# EAGLE board vRef+Therm_Mod_pnl (EAGLE 8.0.1)
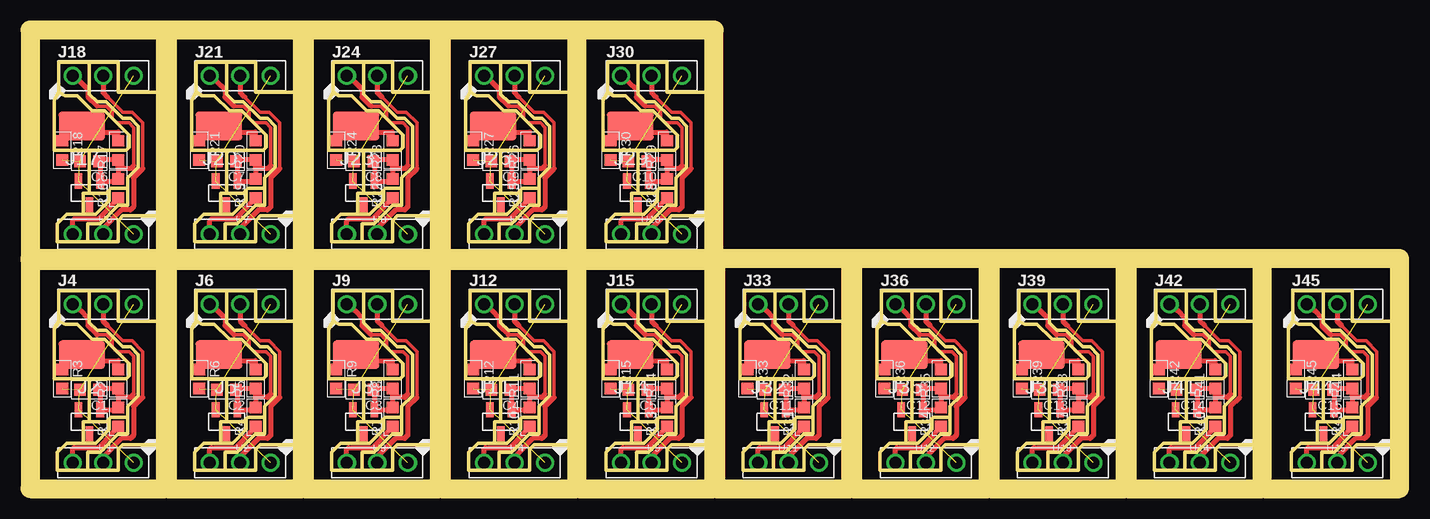
[diagram p0: board, top side]

Size 114.17 x 38.23 mm. Coordinates in mm from the lower left corner, seen from the top.
Outline: 45.72,0 57.02,0 57.02,19.18 45.72,19.18
Outline: 45.72,19.05 57.02,19.05 57.02,38.23 45.72,38.23
Outline: 102.87,0 114.17,0 114.17,19.18 102.87,19.18
Outline: 0,0 11.3,0 11.3,19.18 0,19.18 0,0
Outline: 11.43,0 22.73,0 22.73,19.18 11.43,19.18 11.43,0
Outline: 22.86,0 34.16,0 34.16,19.18 22.86,19.18 22.86,0
Outline: 34.29,0 45.59,0 45.59,19.18 34.29,19.18 34.29,0
Outline: 0,19.05 11.3,19.05 11.3,38.23 0,38.23 0,19.05
Outline: 11.43,19.05 22.73,19.05 22.73,38.23 11.43,38.23 11.43,19.05
Outline: 22.86,19.05 34.16,19.05 34.16,38.23 22.86,38.23 22.86,19.05
Outline: 34.29,19.05 45.59,19.05 45.59,38.23 34.29,38.23 34.29,19.05
Outline: 57.15,0 68.45,0 68.45,19.18 57.15,19.18 57.15,0
Outline: 68.58,0 79.88,0 79.88,19.18 68.58,19.18 68.58,0
Outline: 80.01,0 91.31,0 91.31,19.18 80.01,19.18 80.01,0
Outline: 91.44,0 102.74,0 102.74,19.18 91.44,19.18 91.44,0
Copper layers (1*16): Top 0.035mm / dielectric 1.5mm / Bottom 0.035mm
Design rules "default": minimum track width 10mil, minimum drill 0.6mm, track to track 8mil, track to pad 8mil, pad to pad 8mil, via to via 8mil, smd to smd 8mil, copper to edge 40mil, drill to drill 8mil, minimum pad ring 10mil, minimum via ring 8mil, stop-mask expansion 4mil, vias tented up to drill 0mil, thermal gap 10mil
Milling: 720 lines

## Footprints (pad centres in the part's own frame; a part is rotated, then mirrored left to right if it is on the bottom)
C0603-N = smd 0.95 x 1: 1 -0.8,0; 2 0.8,0
PTH_2.54MM_01X03 = drill 1: P$1 -2.54,0; P$2 0,0; P$3 2.54,0
1X01_LUXEON-PAD = smd 3.9 x 2.4: P$1 0,0
R0603-N = smd 0.95 x 1: 1 -0.8,0; 2 0.8,0
SOT23-3 = smd 0.635 x 1.27: 1 -0.9,-1; 2 0.9,-1; 3 0,1

## Placement (x,y rotation side)
C1  0.1uF  [C0603-N]  4.95,8.25 180 top
C2  0.1uF  [C0603-N]  16.38,8.25 180 top
C3  0.1uF  [C0603-N]  27.81,8.25 180 top
C4  0.1uF  [C0603-N]  39.24,8.25 180 top
C5  0.1uF  [C0603-N]  50.67,8.25 180 top
C6  0.1uF  [C0603-N]  4.95,27.3 180 top
C7  0.1uF  [C0603-N]  16.38,27.3 180 top
C8  0.1uF  [C0603-N]  27.81,27.3 180 top
C9  0.1uF  [C0603-N]  39.24,27.3 180 top
C10  0.1uF  [C0603-N]  50.67,27.3 180 top
C11  0.1uF  [C0603-N]  62.1,8.25 180 top
C12  0.1uF  [C0603-N]  73.53,8.25 180 top
C13  0.1uF  [C0603-N]  84.96,8.25 180 top
C14  0.1uF  [C0603-N]  96.39,8.25 180 top
C15  0.1uF  [C0603-N]  107.82,8.25 180 top
J1  MF-CON-2.54mm-01x03  [PTH_2.54MM_01X03]  6.1,2.16 180 top
J2  CON_01X01LUX  [1X01_LUXEON-PAD]  4.32,11.18 180 top
J3  MF-CON-2.54mm-01x03  [PTH_2.54MM_01X03]  17.53,2.16 180 top
J4  MF-CON-2.54mm-01x03  [PTH_2.54MM_01X03]  6.1,15.37 0 top
J5  CON_01X01LUX  [1X01_LUXEON-PAD]  15.75,11.18 180 top
J6  MF-CON-2.54mm-01x03  [PTH_2.54MM_01X03]  17.53,15.37 0 top
J7  MF-CON-2.54mm-01x03  [PTH_2.54MM_01X03]  28.96,2.16 180 top
J8  CON_01X01LUX  [1X01_LUXEON-PAD]  27.18,11.18 180 top
J9  MF-CON-2.54mm-01x03  [PTH_2.54MM_01X03]  28.96,15.37 0 top
J10  MF-CON-2.54mm-01x03  [PTH_2.54MM_01X03]  40.39,2.16 180 top
J11  CON_01X01LUX  [1X01_LUXEON-PAD]  38.61,11.18 180 top
J12  MF-CON-2.54mm-01x03  [PTH_2.54MM_01X03]  40.39,15.37 0 top
J13  MF-CON-2.54mm-01x03  [PTH_2.54MM_01X03]  51.82,2.16 180 top
J14  CON_01X01LUX  [1X01_LUXEON-PAD]  50.04,11.18 180 top
J15  MF-CON-2.54mm-01x03  [PTH_2.54MM_01X03]  51.82,15.37 0 top
J16  MF-CON-2.54mm-01x03  [PTH_2.54MM_01X03]  6.1,21.21 180 top
J17  CON_01X01LUX  [1X01_LUXEON-PAD]  4.32,30.23 180 top
J18  MF-CON-2.54mm-01x03  [PTH_2.54MM_01X03]  6.1,34.42 0 top
J19  MF-CON-2.54mm-01x03  [PTH_2.54MM_01X03]  17.53,21.21 180 top
J20  CON_01X01LUX  [1X01_LUXEON-PAD]  15.75,30.23 180 top
J21  MF-CON-2.54mm-01x03  [PTH_2.54MM_01X03]  17.53,34.42 0 top
J22  MF-CON-2.54mm-01x03  [PTH_2.54MM_01X03]  28.96,21.21 180 top
J23  CON_01X01LUX  [1X01_LUXEON-PAD]  27.18,30.23 180 top
J24  MF-CON-2.54mm-01x03  [PTH_2.54MM_01X03]  28.96,34.42 0 top
J25  MF-CON-2.54mm-01x03  [PTH_2.54MM_01X03]  40.39,21.21 180 top
J26  CON_01X01LUX  [1X01_LUXEON-PAD]  38.61,30.23 180 top
J27  MF-CON-2.54mm-01x03  [PTH_2.54MM_01X03]  40.39,34.42 0 top
J28  MF-CON-2.54mm-01x03  [PTH_2.54MM_01X03]  51.82,21.21 180 top
J29  CON_01X01LUX  [1X01_LUXEON-PAD]  50.04,30.23 180 top
J30  MF-CON-2.54mm-01x03  [PTH_2.54MM_01X03]  51.82,34.42 0 top
J31  MF-CON-2.54mm-01x03  [PTH_2.54MM_01X03]  63.25,2.16 180 top
J32  CON_01X01LUX  [1X01_LUXEON-PAD]  61.47,11.18 180 top
J33  MF-CON-2.54mm-01x03  [PTH_2.54MM_01X03]  63.25,15.37 0 top
J34  MF-CON-2.54mm-01x03  [PTH_2.54MM_01X03]  74.68,2.16 180 top
J35  CON_01X01LUX  [1X01_LUXEON-PAD]  72.9,11.18 180 top
J36  MF-CON-2.54mm-01x03  [PTH_2.54MM_01X03]  74.68,15.37 0 top
J37  MF-CON-2.54mm-01x03  [PTH_2.54MM_01X03]  86.11,2.16 180 top
J38  CON_01X01LUX  [1X01_LUXEON-PAD]  84.33,11.18 180 top
J39  MF-CON-2.54mm-01x03  [PTH_2.54MM_01X03]  86.11,15.37 0 top
J40  MF-CON-2.54mm-01x03  [PTH_2.54MM_01X03]  97.54,2.16 180 top
J41  CON_01X01LUX  [1X01_LUXEON-PAD]  95.76,11.18 180 top
J42  MF-CON-2.54mm-01x03  [PTH_2.54MM_01X03]  97.54,15.37 0 top
J43  MF-CON-2.54mm-01x03  [PTH_2.54MM_01X03]  108.97,2.16 180 top
J44  CON_01X01LUX  [1X01_LUXEON-PAD]  107.19,11.18 180 top
J45  MF-CON-2.54mm-01x03  [PTH_2.54MM_01X03]  108.97,15.37 0 top
R1  100  [R0603-N]  7.37,5.97 90 top
R2  10k 0.1%  [R0603-N]  7.37,9.14 90 top
R3  10K NTC Thermistor  [R0603-N]  2.67,9.14 270 top
R4  100  [R0603-N]  18.8,5.97 90 top
R5  10k 0.1%  [R0603-N]  18.8,9.14 90 top
R6  10K NTC Thermistor  [R0603-N]  14.1,9.14 270 top
R7  100  [R0603-N]  30.23,5.97 90 top
R8  10k 0.1%  [R0603-N]  30.23,9.14 90 top
R9  10K NTC Thermistor  [R0603-N]  25.53,9.14 270 top
R10  100  [R0603-N]  41.66,5.97 90 top
R11  10k 0.1%  [R0603-N]  41.66,9.14 90 top
R12  10K NTC Thermistor  [R0603-N]  36.96,9.14 270 top
R13  100  [R0603-N]  53.09,5.97 90 top
R14  10k 0.1%  [R0603-N]  53.09,9.14 90 top
R15  10K NTC Thermistor  [R0603-N]  48.39,9.14 270 top
R16  100  [R0603-N]  7.37,25.02 90 top
R17  10k 0.1%  [R0603-N]  7.37,28.19 90 top
R18  10K NTC Thermistor  [R0603-N]  2.67,28.19 270 top
R19  100  [R0603-N]  18.8,25.02 90 top
R20  10k 0.1%  [R0603-N]  18.8,28.19 90 top
R21  10K NTC Thermistor  [R0603-N]  14.1,28.19 270 top
R22  100  [R0603-N]  30.23,25.02 90 top
R23  10k 0.1%  [R0603-N]  30.23,28.19 90 top
R24  10K NTC Thermistor  [R0603-N]  25.53,28.19 270 top
R25  100  [R0603-N]  41.66,25.02 90 top
R26  10k 0.1%  [R0603-N]  41.66,28.19 90 top
R27  10K NTC Thermistor  [R0603-N]  36.96,28.19 270 top
R28  100  [R0603-N]  53.09,25.02 90 top
R29  10k 0.1%  [R0603-N]  53.09,28.19 90 top
R30  10K NTC Thermistor  [R0603-N]  48.39,28.19 270 top
R31  100  [R0603-N]  64.52,5.97 90 top
R32  10k 0.1%  [R0603-N]  64.52,9.14 90 top
R33  10K NTC Thermistor  [R0603-N]  59.82,9.14 270 top
R34  100  [R0603-N]  75.95,5.97 90 top
R35  10k 0.1%  [R0603-N]  75.95,9.14 90 top
R36  10K NTC Thermistor  [R0603-N]  71.25,9.14 270 top
R37  100  [R0603-N]  87.38,5.97 90 top
R38  10k 0.1%  [R0603-N]  87.38,9.14 90 top
R39  10K NTC Thermistor  [R0603-N]  82.68,9.14 270 top
R40  100  [R0603-N]  98.81,5.97 90 top
R41  10k 0.1%  [R0603-N]  98.81,9.14 90 top
R42  10K NTC Thermistor  [R0603-N]  94.11,9.14 270 top
R43  100  [R0603-N]  110.24,5.97 90 top
R44  10k 0.1%  [R0603-N]  110.24,9.14 90 top
R45  10K NTC Thermistor  [R0603-N]  105.54,9.14 270 top
U1  LM4040-SOT-23-3  [SOT23-3]  4.95,5.59 180 top
U2  LM4040-SOT-23-3  [SOT23-3]  16.38,5.59 180 top
U3  LM4040-SOT-23-3  [SOT23-3]  27.81,5.59 180 top
U4  LM4040-SOT-23-3  [SOT23-3]  39.24,5.59 180 top
U5  LM4040-SOT-23-3  [SOT23-3]  50.67,5.59 180 top
U6  LM4040-SOT-23-3  [SOT23-3]  4.95,24.64 180 top
U7  LM4040-SOT-23-3  [SOT23-3]  16.38,24.64 180 top
U8  LM4040-SOT-23-3  [SOT23-3]  27.81,24.64 180 top
U9  LM4040-SOT-23-3  [SOT23-3]  39.24,24.64 180 top
U10  LM4040-SOT-23-3  [SOT23-3]  50.67,24.64 180 top
U11  LM4040-SOT-23-3  [SOT23-3]  62.1,5.59 180 top
U12  LM4040-SOT-23-3  [SOT23-3]  73.53,5.59 180 top
U13  LM4040-SOT-23-3  [SOT23-3]  84.96,5.59 180 top
U14  LM4040-SOT-23-3  [SOT23-3]  96.39,5.59 180 top
U15  LM4040-SOT-23-3  [SOT23-3]  107.82,5.59 180 top

## Library data of the parts
C1-C15 R1-R45 = My_Passives
J1 J3 J4 J6 J7 J9 J10 J12 J13 J15 J16 J18 J19 J21 J22 J24 J25 J27 J28 J30 J31 J33 J34 J36 J37 J39 J40 J42 J43 J45 = My_Connectors; HOUSEPART: YES; MPN: MF-CON-2.54mm-01x03; POPULATE: 1; URL: https://factory.macrofab.com/part/MF-CON-2.54mm-01x03
J2 J5 J8 J11 J14 J17 J20 J23 J26 J29 J32 J35 J38 J41 J44 = My_Connectors
U1-U15 = My_Descrete_Semiconductors; PARTNO: LM4040AIM3-2.0/NOPB

## Nets
2V0: C1.1 J4.P$1 R1.2 R2.1 U1.1
2V1: C2.1 J6.P$1 R4.2 R5.1 U2.1
2V2: C3.1 J9.P$1 R7.2 R8.1 U3.1
2V3: C4.1 J12.P$1 R10.2 R11.1 U4.1
2V4: C5.1 J15.P$1 R13.2 R14.1 U5.1
2V5: C6.1 J18.P$1 R16.2 R17.1 U6.1
2V6: C7.1 J21.P$1 R19.2 R20.1 U7.1
2V7: C8.1 J24.P$1 R22.2 R23.1 U8.1
2V8: C9.1 J27.P$1 R25.2 R26.1 U9.1
2V9: C10.1 J30.P$1 R28.2 R29.1 U10.1
2V10: C11.1 J33.P$1 R31.2 R32.1 U11.1
2V11: C12.1 J36.P$1 R34.2 R35.1 U12.1
2V12: C13.1 J39.P$1 R37.2 R38.1 U13.1
2V13: C14.1 J42.P$1 R40.2 R41.1 U14.1
2V14: C15.1 J45.P$1 R43.2 R44.1 U15.1
3V1: J3.P$3 R4.1
3V2: J7.P$3 R7.1
3V3: J1.P$3 R1.1
3V4: J10.P$3 R10.1
3V5: J13.P$3 R13.1
3V6: J16.P$3 R16.1
3V7: J19.P$3 R19.1
3V8: J22.P$3 R22.1
3V9: J25.P$3 R25.1
3V10: J28.P$3 R28.1
3V11: J31.P$3 R31.1
3V12: J34.P$3 R34.1
3V13: J37.P$3 R37.1
3V14: J40.P$3 R40.1
3V15: J43.P$3 R43.1
GND: C1.2 J1.P$1 J4.P$3 R3.2 U1.2
GND1: C2.2 J3.P$1 J6.P$3 R6.2 U2.2
GND2: C3.2 J7.P$1 J9.P$3 R9.2 U3.2
GND3: C4.2 J10.P$1 J12.P$3 R12.2 U4.2
GND4: C5.2 J13.P$1 J15.P$3 R15.2 U5.2
GND5: C6.2 J16.P$1 J18.P$3 R18.2 U6.2
GND6: C7.2 J19.P$1 J21.P$3 R21.2 U7.2
GND7: C8.2 J22.P$1 J24.P$3 R24.2 U8.2
GND8: C9.2 J25.P$1 J27.P$3 R27.2 U9.2
GND9: C10.2 J28.P$1 J30.P$3 R30.2 U10.2
GND10: C11.2 J31.P$1 J33.P$3 R33.2 U11.2
GND11: C12.2 J34.P$1 J36.P$3 R36.2 U12.2
GND12: C13.2 J37.P$1 J39.P$3 R39.2 U13.2
GND13: C14.2 J40.P$1 J42.P$3 R42.2 U14.2
GND14: C15.2 J43.P$1 J45.P$3 R45.2 U15.2
SENSE: J1.P$2 J4.P$2
SENSE1: J3.P$2 J6.P$2
SENSE2: J7.P$2 J9.P$2
SENSE3: J10.P$2 J12.P$2
SENSE4: J13.P$2 J15.P$2
SENSE5: J16.P$2 J18.P$2
SENSE6: J19.P$2 J21.P$2
SENSE7: J22.P$2 J24.P$2
SENSE8: J25.P$2 J27.P$2
SENSE9: J28.P$2 J30.P$2
SENSE10: J31.P$2 J33.P$2
SENSE11: J34.P$2 J36.P$2
SENSE12: J37.P$2 J39.P$2
SENSE13: J40.P$2 J42.P$2
SENSE14: J43.P$2 J45.P$2
THERM: J2.P$1 R2.2 R3.1
THERM1: J5.P$1 R5.2 R6.1
THERM2: J8.P$1 R8.2 R9.1
THERM3: J11.P$1 R11.2 R12.1
THERM4: J14.P$1 R14.2 R15.1
THERM5: J17.P$1 R17.2 R18.1
THERM6: J20.P$1 R20.2 R21.1
THERM7: J23.P$1 R23.2 R24.1
THERM8: J26.P$1 R26.2 R27.1
THERM9: J29.P$1 R29.2 R30.1
THERM10: J32.P$1 R32.2 R33.1
THERM11: J35.P$1 R35.2 R36.1
THERM12: J38.P$1 R38.2 R39.1
THERM13: J41.P$1 R41.2 R42.1
THERM14: J44.P$1 R44.2 R45.1

## Tracks (layer width: path | path; a pad name or v marks a point on that pad's centre or on a via)
2V0
  Top 0.305: 8.64,7.87 8.64,11.05 8.25,11.43 7.24,11.43 6.86,11.81 6.86,12.32 6.35,12.83 5.59,12.83
  Top 0.406: 5.85,8.15 U1.1 7.18,6.59 R1.2 7.37,7.62 | 5.85,8.15 C1.1 | 7.37,7.62 R2.1 6.04,8.34 5.85,8.15 | 8.64,7.87 8.38,7.62 7.37,7.62 | J4.P$1 4.19,14.86 4.83,14.22 4.83,13.59 5.59,12.83
2V1
  Top 0.305: 20.07,7.87 20.07,11.05 19.69,11.43 18.67,11.43 18.29,11.81 18.29,12.32 17.78,12.83 17.02,12.83
  Top 0.406: 17.28,8.15 U2.1 18.62,6.59 R4.2 18.8,7.62 | 17.28,8.15 C2.1 | 18.8,7.62 R5.1 17.47,8.34 17.28,8.15 | 20.07,7.87 19.81,7.62 18.8,7.62 | J6.P$1 15.62,14.86 16.26,14.22 16.26,13.59 17.02,12.83
2V2
  Top 0.305: 31.5,7.87 31.5,11.05 31.12,11.43 30.1,11.43 29.72,11.81 29.72,12.32 29.21,12.83 28.45,12.83
  Top 0.406: 28.71,8.15 U3.1 30.05,6.59 R7.2 30.23,7.62 | 28.71,8.15 C3.1 | 30.23,7.62 R8.1 28.9,8.34 28.71,8.15 | 31.5,7.87 31.24,7.62 30.23,7.62 | J9.P$1 27.05,14.86 27.69,14.22 27.69,13.59 28.45,12.83
2V3
  Top 0.305: 42.93,7.87 42.93,11.05 42.55,11.43 41.53,11.43 41.15,11.81 41.15,12.32 40.64,12.83 39.88,12.83
  Top 0.406: 40.14,8.15 U4.1 41.48,6.59 R10.2 41.66,7.62 | 40.14,8.15 C4.1 | 41.66,7.62 R11.1 40.33,8.34 40.14,8.15 | 42.93,7.87 42.67,7.62 41.66,7.62 | J12.P$1 38.48,14.86 39.12,14.22 39.12,13.59 39.88,12.83
2V4
  Top 0.305: 54.36,7.87 54.36,11.05 53.98,11.43 52.96,11.43 52.58,11.81 52.58,12.32 52.07,12.83 51.31,12.83
  Top 0.406: 51.57,8.15 U5.1 52.91,6.59 R13.2 53.09,7.62 | 51.57,8.15 C5.1 | 53.09,7.62 R14.1 51.76,8.34 51.57,8.15 | 54.36,7.87 54.1,7.62 53.09,7.62 | J15.P$1 49.91,14.86 50.55,14.22 50.55,13.59 51.31,12.83
2V5
  Top 0.305: 8.64,26.92 8.64,30.1 8.25,30.48 7.24,30.48 6.86,30.86 6.86,31.37 6.35,31.88 5.59,31.88
  Top 0.406: 5.85,27.2 U6.1 7.18,25.64 R16.2 7.37,26.67 | 5.85,27.2 C6.1 | 7.37,26.67 R17.1 6.04,27.39 5.85,27.2 | 8.64,26.92 8.38,26.67 7.37,26.67 | J18.P$1 4.19,33.91 4.83,33.27 4.83,32.64 5.59,31.88
2V6
  Top 0.305: 20.07,26.92 20.07,30.1 19.69,30.48 18.67,30.48 18.29,30.86 18.29,31.37 17.78,31.88 17.02,31.88
  Top 0.406: 17.28,27.2 U7.1 18.62,25.64 R19.2 18.8,26.67 | 17.28,27.2 C7.1 | 18.8,26.67 R20.1 17.47,27.39 17.28,27.2 | 20.07,26.92 19.81,26.67 18.8,26.67 | J21.P$1 15.62,33.91 16.26,33.27 16.26,32.64 17.02,31.88
2V7
  Top 0.305: 31.5,26.92 31.5,30.1 31.12,30.48 30.1,30.48 29.72,30.86 29.72,31.37 29.21,31.88 28.45,31.88
  Top 0.406: 28.71,27.2 U8.1 30.05,25.64 R22.2 30.23,26.67 | 28.71,27.2 C8.1 | 30.23,26.67 R23.1 28.9,27.39 28.71,27.2 | 31.5,26.92 31.24,26.67 30.23,26.67 | J24.P$1 27.05,33.91 27.69,33.27 27.69,32.64 28.45,31.88
2V8
  Top 0.305: 42.93,26.92 42.93,30.1 42.55,30.48 41.53,30.48 41.15,30.86 41.15,31.37 40.64,31.88 39.88,31.88
  Top 0.406: 40.14,27.2 U9.1 41.48,25.64 R25.2 41.66,26.67 | 40.14,27.2 C9.1 | 41.66,26.67 R26.1 40.33,27.39 40.14,27.2 | 42.93,26.92 42.67,26.67 41.66,26.67 | J27.P$1 38.48,33.91 39.12,33.27 39.12,32.64 39.88,31.88
2V9
  Top 0.305: 54.36,26.92 54.36,30.1 53.98,30.48 52.96,30.48 52.58,30.86 52.58,31.37 52.07,31.88 51.31,31.88
  Top 0.406: 51.57,27.2 U10.1 52.91,25.64 R28.2 53.09,26.67 | 51.57,27.2 C10.1 | 53.09,26.67 R29.1 51.76,27.39 51.57,27.2 | 54.36,26.92 54.1,26.67 53.09,26.67 | J30.P$1 49.91,33.91 50.55,33.27 50.55,32.64 51.31,31.88
2V10
  Top 0.305: 65.79,7.87 65.79,11.05 65.41,11.43 64.39,11.43 64.01,11.81 64.01,12.32 63.5,12.83 62.74,12.83
  Top 0.406: 63,8.15 U11.1 64.34,6.59 R31.2 64.52,7.62 | 63,8.15 C11.1 | 64.52,7.62 R32.1 63.19,8.34 63,8.15 | 65.79,7.87 65.53,7.62 64.52,7.62 | J33.P$1 61.34,14.86 61.98,14.22 61.98,13.59 62.74,12.83
2V11
  Top 0.305: 77.22,7.87 77.22,11.05 76.84,11.43 75.82,11.43 75.44,11.81 75.44,12.32 74.93,12.83 74.17,12.83
  Top 0.406: 74.43,8.15 U12.1 75.77,6.59 R34.2 75.95,7.62 | 74.43,8.15 C12.1 | 75.95,7.62 R35.1 74.62,8.34 74.43,8.15 | 77.22,7.87 76.96,7.62 75.95,7.62 | J36.P$1 72.77,14.86 73.41,14.22 73.41,13.59 74.17,12.83
2V12
  Top 0.305: 88.65,7.87 88.65,11.05 88.27,11.43 87.25,11.43 86.87,11.81 86.87,12.32 86.36,12.83 85.6,12.83
  Top 0.406: 85.86,8.15 U13.1 87.2,6.59 R37.2 87.38,7.62 | 85.86,8.15 C13.1 | 87.38,7.62 R38.1 86.05,8.34 85.86,8.15 | 88.65,7.87 88.39,7.62 87.38,7.62 | J39.P$1 84.2,14.86 84.84,14.22 84.84,13.59 85.6,12.83
2V13
  Top 0.305: 100.08,7.87 100.08,11.05 99.7,11.43 98.68,11.43 98.3,11.81 98.3,12.32 97.79,12.83 97.03,12.83
  Top 0.406: 97.29,8.15 U14.1 98.62,6.59 R40.2 98.81,7.62 | 97.29,8.15 C14.1 | 98.81,7.62 R41.1 97.48,8.34 97.29,8.15 | 100.08,7.87 99.82,7.62 98.81,7.62 | J42.P$1 95.63,14.86 96.27,14.22 96.27,13.59 97.03,12.83
2V14
  Top 0.305: 111.51,7.87 111.51,11.05 111.12,11.43 110.11,11.43 109.73,11.81 109.73,12.32 109.22,12.83 108.46,12.83
  Top 0.406: 108.72,8.15 U15.1 110.06,6.59 R43.2 110.24,7.62 | 108.72,8.15 C15.1 | 110.24,7.62 R44.1 108.91,8.34 108.72,8.15 | 111.51,7.87 111.25,7.62 110.24,7.62 | J45.P$1 107.06,14.86 107.7,14.22 107.7,13.59 108.46,12.83
3V1
  Top 0.406: J3.P$3 14.99,3.3 15.11,3.43 17.15,3.43 17.53,3.81 R4.1
3V2
  Top 0.406: J7.P$3 26.42,3.3 26.54,3.43 28.58,3.43 28.96,3.81 R7.1
3V3
  Top 0.406: J1.P$3 3.56,3.3 3.68,3.43 5.71,3.43 6.1,3.81 R1.1
3V4
  Top 0.406: J10.P$3 37.85,3.3 37.97,3.43 40,3.43 40.39,3.81 R10.1
3V5
  Top 0.406: J13.P$3 49.28,3.3 49.4,3.43 51.43,3.43 51.82,3.81 R13.1
3V6
  Top 0.406: J16.P$3 3.56,22.35 3.68,22.48 5.71,22.48 6.1,22.86 R16.1
3V7
  Top 0.406: J19.P$3 14.99,22.35 15.11,22.48 17.15,22.48 17.53,22.86 R19.1
3V8
  Top 0.406: J22.P$3 26.42,22.35 26.54,22.48 28.58,22.48 28.96,22.86 R22.1
3V9
  Top 0.406: J25.P$3 37.85,22.35 37.97,22.48 40,22.48 40.39,22.86 R25.1
3V10
  Top 0.406: J28.P$3 49.28,22.35 49.4,22.48 51.43,22.48 51.82,22.86 R28.1
3V11
  Top 0.406: J31.P$3 60.71,3.3 60.83,3.43 62.86,3.43 63.25,3.81 R31.1
3V12
  Top 0.406: J34.P$3 72.14,3.3 72.26,3.43 74.3,3.43 74.68,3.81 R34.1
3V13
  Top 0.406: J37.P$3 83.57,3.3 83.69,3.43 85.73,3.43 86.11,3.81 R37.1
3V14
  Top 0.406: J40.P$3 95,3.3 95.12,3.43 97.16,3.43 97.54,3.81 R40.1
3V15
  Top 0.406: J43.P$3 106.43,3.3 106.55,3.43 108.59,3.43 108.97,3.81 R43.1
GND  (4 unrouted)
GND1  (4 unrouted)
GND2  (4 unrouted)
GND3  (4 unrouted)
GND4  (4 unrouted)
GND5  (4 unrouted)
GND6  (4 unrouted)
GND7  (4 unrouted)
GND8  (4 unrouted)
GND9  (4 unrouted)
GND10  (4 unrouted)
GND11  (4 unrouted)
GND12  (4 unrouted)
GND13  (4 unrouted)
GND14  (4 unrouted)
SENSE
  Top 0.305: 9.4,7.62 9.4,11.43 8.51,12.32 7.75,12.32 6.48,13.59
  Top 0.406: J1.P$2 6.1,2.67 7.62,4.19 8.38,4.19 8.64,4.45 8.64,6.86 9.4,7.62 | J4.P$2 6.1,13.97 6.48,13.59
SENSE1
  Top 0.305: 20.83,7.62 20.83,11.43 19.94,12.32 19.18,12.32 17.91,13.59
  Top 0.406: J3.P$2 17.53,2.67 19.05,4.19 19.81,4.19 20.07,4.45 20.07,6.86 20.83,7.62 | J6.P$2 17.53,13.97 17.91,13.59
SENSE2
  Top 0.305: 32.26,7.62 32.26,11.43 31.37,12.32 30.61,12.32 29.34,13.59
  Top 0.406: J7.P$2 28.96,2.67 30.48,4.19 31.24,4.19 31.5,4.45 31.5,6.86 32.26,7.62 | J9.P$2 28.96,13.97 29.34,13.59
SENSE3
  Top 0.305: 43.69,7.62 43.69,11.43 42.8,12.32 42.04,12.32 40.77,13.59
  Top 0.406: J10.P$2 40.39,2.67 41.91,4.19 42.67,4.19 42.93,4.45 42.93,6.86 43.69,7.62 | J12.P$2 40.39,13.97 40.77,13.59
SENSE4
  Top 0.305: 55.12,7.62 55.12,11.43 54.23,12.32 53.47,12.32 52.2,13.59
  Top 0.406: J13.P$2 51.82,2.67 53.34,4.19 54.1,4.19 54.36,4.45 54.36,6.86 55.12,7.62 | J15.P$2 51.82,13.97 52.2,13.59
SENSE5
  Top 0.305: 9.4,26.67 9.4,30.48 8.51,31.37 7.75,31.37 6.48,32.64
  Top 0.406: J16.P$2 6.1,21.72 7.62,23.24 8.38,23.24 8.64,23.5 8.64,25.91 9.4,26.67 | J18.P$2 6.1,33.02 6.48,32.64
SENSE6
  Top 0.305: 20.83,26.67 20.83,30.48 19.94,31.37 19.18,31.37 17.91,32.64
  Top 0.406: J19.P$2 17.53,21.72 19.05,23.24 19.81,23.24 20.07,23.5 20.07,25.91 20.83,26.67 | J21.P$2 17.53,33.02 17.91,32.64
SENSE7
  Top 0.305: 32.26,26.67 32.26,30.48 31.37,31.37 30.61,31.37 29.34,32.64
  Top 0.406: J22.P$2 28.96,21.72 30.48,23.24 31.24,23.24 31.5,23.5 31.5,25.91 32.26,26.67 | J24.P$2 28.96,33.02 29.34,32.64
SENSE8
  Top 0.305: 43.69,26.67 43.69,30.48 42.8,31.37 42.04,31.37 40.77,32.64
  Top 0.406: J25.P$2 40.39,21.72 41.91,23.24 42.67,23.24 42.93,23.5 42.93,25.91 43.69,26.67 | J27.P$2 40.39,33.02 40.77,32.64
SENSE9
  Top 0.305: 55.12,26.67 55.12,30.48 54.23,31.37 53.47,31.37 52.2,32.64
  Top 0.406: J28.P$2 51.82,21.72 53.34,23.24 54.1,23.24 54.36,23.5 54.36,25.91 55.12,26.67 | J30.P$2 51.82,33.02 52.2,32.64
SENSE10
  Top 0.305: 66.55,7.62 66.55,11.43 65.66,12.32 64.9,12.32 63.63,13.59
  Top 0.406: J31.P$2 63.25,2.67 64.77,4.19 65.53,4.19 65.79,4.45 65.79,6.86 66.55,7.62 | J33.P$2 63.25,13.97 63.63,13.59
SENSE11
  Top 0.305: 77.98,7.62 77.98,11.43 77.09,12.32 76.33,12.32 75.06,13.59
  Top 0.406: J34.P$2 74.68,2.67 76.2,4.19 76.96,4.19 77.22,4.45 77.22,6.86 77.98,7.62 | J36.P$2 74.68,13.97 75.06,13.59
SENSE12
  Top 0.305: 89.41,7.62 89.41,11.43 88.52,12.32 87.76,12.32 86.49,13.59
  Top 0.406: J37.P$2 86.11,2.67 87.63,4.19 88.39,4.19 88.65,4.45 88.65,6.86 89.41,7.62 | J39.P$2 86.11,13.97 86.49,13.59
SENSE13
  Top 0.305: 100.84,7.62 100.84,11.43 99.95,12.32 99.19,12.32 97.92,13.59
  Top 0.406: J40.P$2 97.54,2.67 99.06,4.19 99.82,4.19 100.08,4.45 100.08,6.86 100.84,7.62 | J42.P$2 97.54,13.97 97.92,13.59
SENSE14
  Top 0.305: 112.27,7.62 112.27,11.43 111.38,12.32 110.62,12.32 109.35,13.59
  Top 0.406: J43.P$2 108.97,2.67 110.49,4.19 111.25,4.19 111.51,4.45 111.51,6.86 112.27,7.62 | J45.P$2 108.97,13.97 109.35,13.59
THERM
  Top 0.305: 3.68,11.05 3.81,11.18 J2.P$1 3.9,11.18 R3.1
  Top 0.406: R2.2 7.37,10.67 4.06,10.67 3.68,11.05 J2.P$1
THERM1
  Top 0.305: 15.11,11.05 15.24,11.18 J5.P$1 15.33,11.18 R6.1
  Top 0.406: R5.2 18.8,10.67 15.49,10.67 15.11,11.05 J5.P$1
THERM2
  Top 0.305: 26.54,11.05 26.67,11.18 J8.P$1 26.76,11.18 R9.1
  Top 0.406: R8.2 30.23,10.67 26.92,10.67 26.54,11.05 J8.P$1
THERM3
  Top 0.305: 37.97,11.05 38.1,11.18 J11.P$1 38.19,11.18 R12.1
  Top 0.406: R11.2 41.66,10.67 38.35,10.67 37.97,11.05 J11.P$1
THERM4
  Top 0.305: 49.4,11.05 49.53,11.18 J14.P$1 49.62,11.18 R15.1
  Top 0.406: R14.2 53.09,10.67 49.78,10.67 49.4,11.05 J14.P$1
THERM5
  Top 0.305: 3.68,30.1 3.81,30.23 J17.P$1 3.9,30.23 R18.1
  Top 0.406: R17.2 7.37,29.72 4.06,29.72 3.68,30.1 J17.P$1
THERM6
  Top 0.305: 15.11,30.1 15.24,30.23 J20.P$1 15.33,30.23 R21.1
  Top 0.406: R20.2 18.8,29.72 15.49,29.72 15.11,30.1 J20.P$1
THERM7
  Top 0.305: 26.54,30.1 26.67,30.23 J23.P$1 26.76,30.23 R24.1
  Top 0.406: R23.2 30.23,29.72 26.92,29.72 26.54,30.1 J23.P$1
THERM8
  Top 0.305: 37.97,30.1 38.1,30.23 J26.P$1 38.19,30.23 R27.1
  Top 0.406: R26.2 41.66,29.72 38.35,29.72 37.97,30.1 J26.P$1
THERM9
  Top 0.305: 49.4,30.1 49.53,30.23 J29.P$1 49.62,30.23 R30.1
  Top 0.406: R29.2 53.09,29.72 49.78,29.72 49.4,30.1 J29.P$1
THERM10
  Top 0.305: 60.83,11.05 60.96,11.18 J32.P$1 61.05,11.18 R33.1
  Top 0.406: R32.2 64.52,10.67 61.21,10.67 60.83,11.05 J32.P$1
THERM11
  Top 0.305: 72.26,11.05 72.39,11.18 J35.P$1 72.48,11.18 R36.1
  Top 0.406: R35.2 75.95,10.67 72.64,10.67 72.26,11.05 J35.P$1
THERM12
  Top 0.305: 83.69,11.05 83.82,11.18 J38.P$1 83.91,11.18 R39.1
  Top 0.406: R38.2 87.38,10.67 84.07,10.67 83.69,11.05 J38.P$1
THERM13
  Top 0.305: 95.12,11.05 95.25,11.18 J41.P$1 95.34,11.18 R42.1
  Top 0.406: R41.2 98.81,10.67 95.5,10.67 95.12,11.05 J41.P$1
THERM14
  Top 0.305: 106.55,11.05 106.68,11.18 J44.P$1 106.77,11.18 R45.1
  Top 0.406: R44.2 110.24,10.67 106.93,10.67 106.55,11.05 J44.P$1